# Altium PCB HM11.PcbDoc
Units mm, origin at the board's own origin, x right, y up, seen from the top; angles counter-clockwise.
Board outline 36.45 x 30.48 mm, 2 copper layers (Top Layer, Bottom Layer); 22 components, 29 nets, 107 pads, 20 vias.
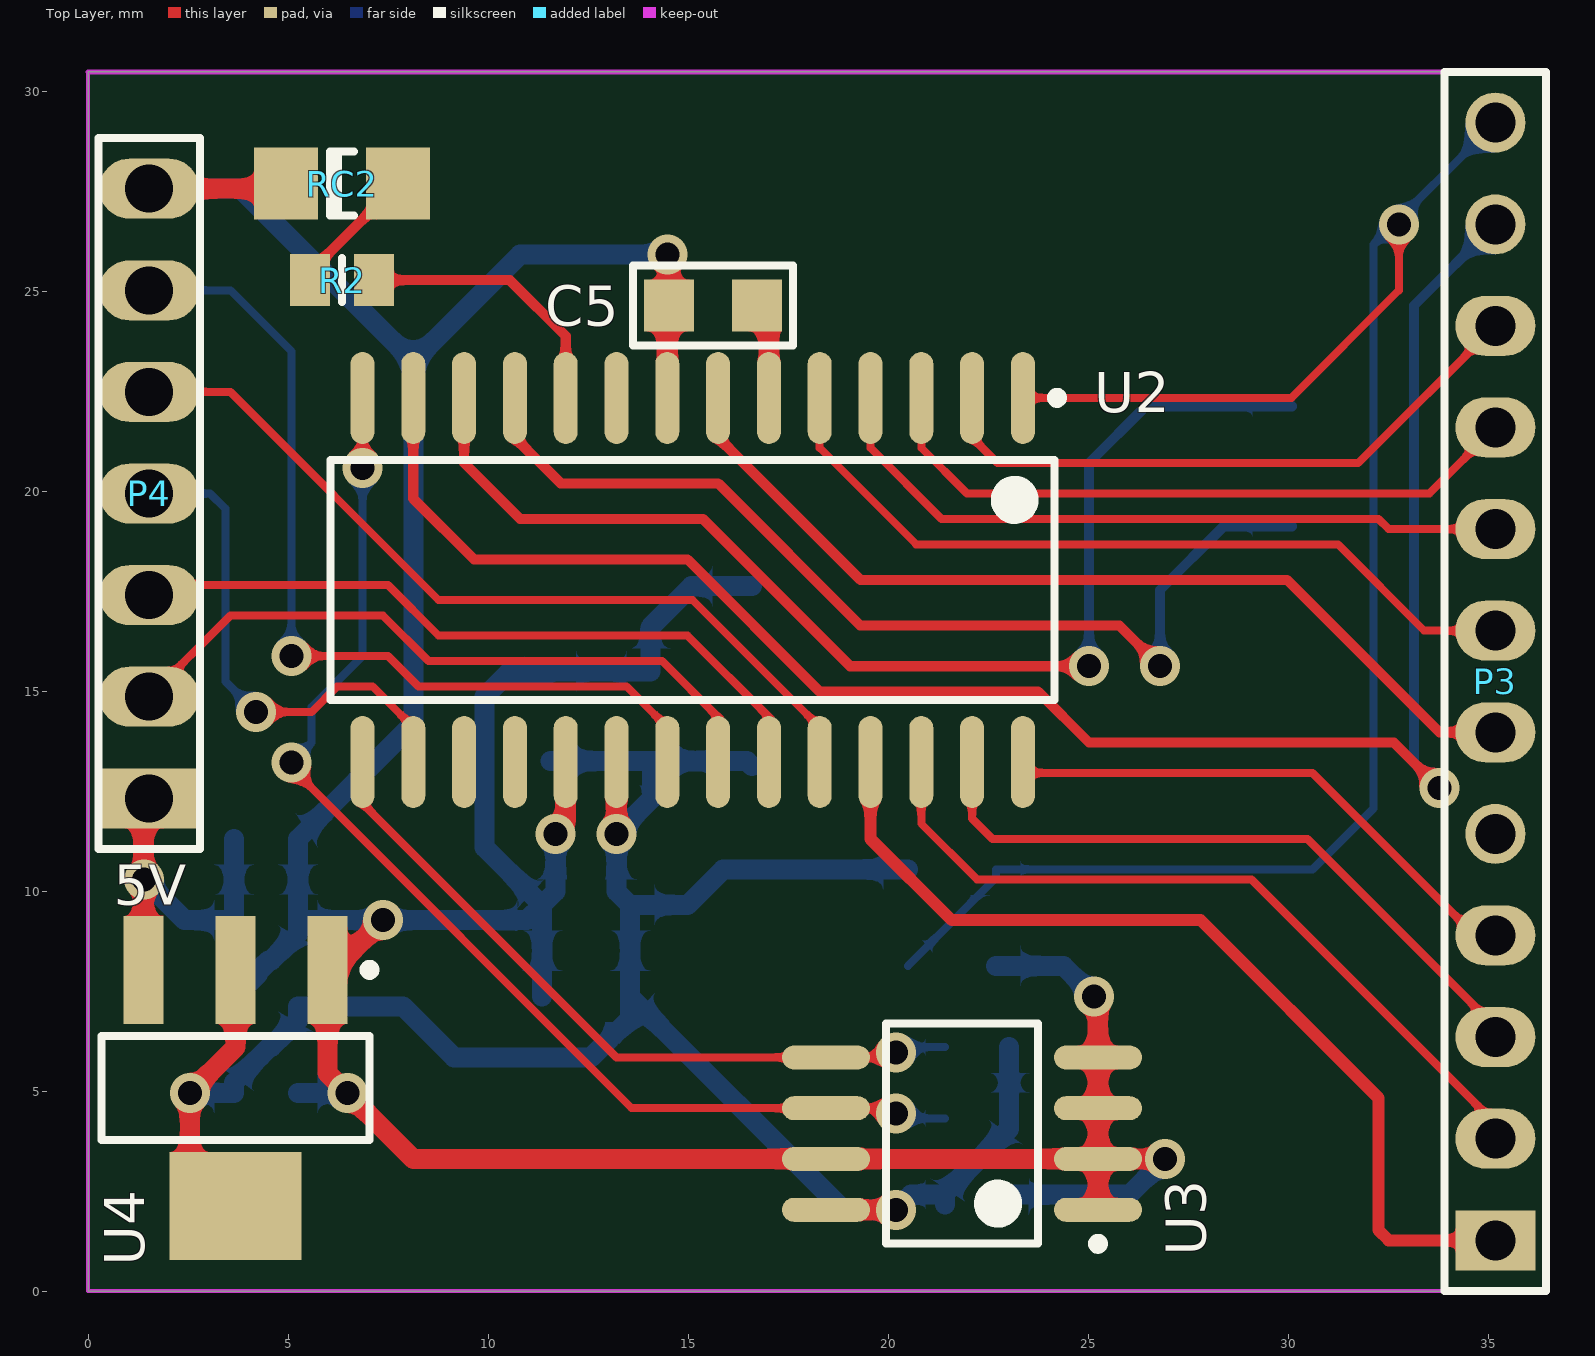
[diagram p0: Top Layer view]
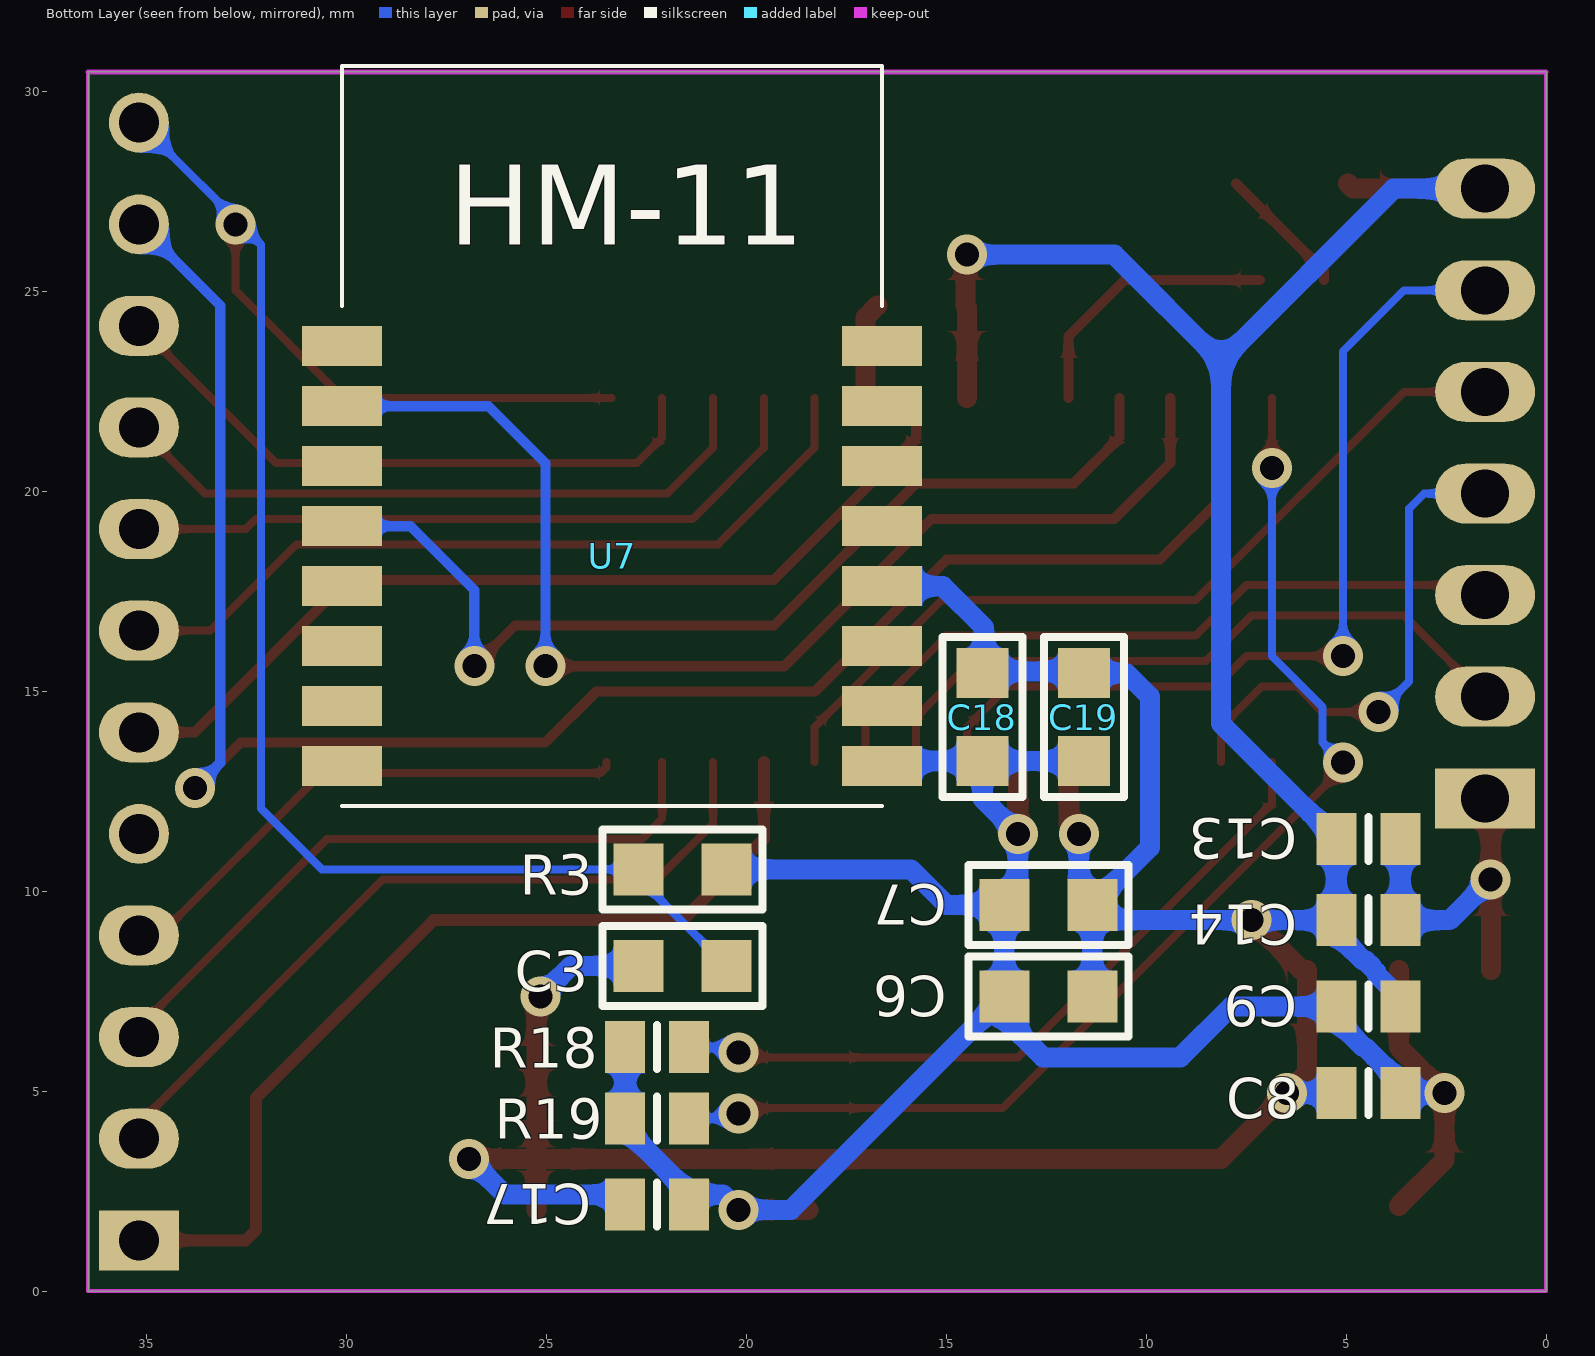
[diagram p1: Bottom Layer view, seen from below]

## Layer stack, top to bottom
Top Solder: solder mask 0.0102, Solder Resist, Dk 3.5
Top Layer: signal copper 0.0356
Dielectric1: dielectric 0.32, FR-4, Dk 4.8
Bottom Layer: signal copper 0.0356
Bottom Solder: solder mask 0.0102, Solder Resist, Dk 3.5

## Board outline
0,0 0,30.48 36.449,30.48 36.449,0

## Design rules (kind name [scope] priority, off if disabled: settings)
Clearance [All] p1: gap=0.254
MinimumSolderMaskSliver [All] p1 off: minsoldermaskwidth=0.254
PlaneConnect [All] p1: planeconnectstyle=Direct reliefexpansion=0.508 reliefentries=4 reliefconductorwidth=0.254 reliefairgap=0.254
PolygonConnect [All] p1: connectstyle=Relief reliefconductorwidth=0.254 reliefentries=4 polygonreliefangle="90 Angle" airgapwidth=0.254
RoutingVias [All] p1: holewidth=0.711 width=1.27 viastyle="Through Hole" minholewidth=0.2 minwidth=0.3 maxholewidth=2 maxwidth=3
SilkToSilkClearance [All] p1 off: silktosilkclearance=0.254
SilkToSolderMaskClearance SilkscreenOverComponentPads [IsPad] p1 off: minsilkscreentomaskgap=0.254 clearancetoexposedcopper=TRUE
SolderMaskExpansion [All] p1: expansion=0.102
Width [All] p1: maxlimit=1 minlimit=0.2 preferedwidth=0.254
26 further rules are at their usual default settings.

## Components (designator, comment, footprint, x,y, rotation, side; value= is the part's Value field where it differs from the comment)
C3 "CL21F104ZBCNNNC" CAPC2013X05N 21.59,8.128 r180 bottom
C5 "GRM219R60J106KE19D" CAPC2013X05N 15.621,24.638 r0 top
C6 "GRM219R60J106KE19D" CAPC2013X05N 12.446,7.366 r0 bottom
C7 "GRM219R60J106KE19D" CAPC2013X05N 12.446,9.652 r0 bottom
C8 "CL21F104ZBCNNNC" RESC2012L 4.445,4.953 r0 bottom
C9 "GRM219R60J106KE19D" RESC2012L 4.445,7.112 r180 bottom
C13 "CL21F104ZBCNNNC" RESC2012L 4.445,11.303 r0 bottom
C14 "GRM219R60J106KE19D" RESC2012L 4.445,9.271 r0 bottom
C17 "GRM219R60J106KE19D" RESC2012L 22.225,2.159 r0 bottom
C18 "CL21F104ZBCNNNC" CAPC2013X05N 14.097,14.351 r90 bottom
C19 "GRM219R60J106KE19D" CAPC2013X05N 11.557,14.351 r90 bottom
P3 "Header 12" HDR1X12 35.179,1.27 r90 top
P4 "Header 7" HDR1X7 1.524,12.319 r90 top
R2 "NC" RESC2012L 6.35,25.273 r180 top
R3 "ERJ-6GEYJ103V" RESC2013X05N 21.59,10.541 r0 bottom
R18 "ERJ-6GEYJ103V" RESC2012L 22.225,6.096 r0 bottom
R19 "ERJ-6GEYJ103V" RESC2012L 22.225,4.318 r0 bottom
RC2 "NC" CD3216-1206 6.35,27.686 r180 top
U2 "PIC18F24J11-I/SO" SOIC-SO28_N 15.113,17.78 r270 top locked
U3 "24AA1025T-I/SM" SOIJ-SM8_N 21.844,3.937 r180 top
U4 "AMS1117" SOT223-4M 3.683,5.08 r270 top
U7 "HM-11" HM-11 30.099,23.622 r180 bottom

## Footprints (in the part's own frame and the unit in brackets; to place one, negate y for a bottom-side part, rotate by r counter-clockwise, add the part's x,y. Pads: shape width x height; smd on the part's side, far side on the other; paste and mask are expansions set on the pad)
CAPC2013X05N [mm] "Chip Capacitor, 2-Leads, Body 2,0x1,3mm, IPC Medium Density"
  rect 1.25x1.3 smd: 1(-1.1,0) 2(1.1,0)
  silkscreen extent -2,-1 2,1, body extent -1.05,-0.67 1.05,0.68, height 0.5
CD3216-1206 [mm] "Chip Diode; Body 3.2 x 1.6 mm (LxW typ)"
  rect 1.6x1.8 smd: 1(-1.4,0) 2(1.4,0)
  silkscreen extent -0.3,-0.8 0.3,0.8
HDR1X7 [mm] "Connector; Header; 7 Position"
  rect 1.5x2.5 hole 1.2: 1(0,0)
  oval 1.5x2.5 hole 1.2: 2(2.54,0) 3(5.08,0) 4(7.62,0) 5(10.16,0) 6(12.7,0) 7(15.24,0)
  silkscreen extent -1.27,-1.27 16.51,1.27
HDR1X12 [mm] "Connector; Header; 12 Position"
  rect 1.5x2 hole 1: 1(0,0)
  oval 1.5x2 hole 1: 2(2.54,0) 3(5.08,0) 4(7.62,0) 6(12.7,0) 7(15.24,0) 8(17.78,0) 9(20.32,0) 10(22.86,0)
  round 1.5 hole 1: 5(10.16,0) 11(25.4,0) 12(27.94,0)
  silkscreen extent -1.27,-1.27 29.21,1.27
HM-11 [mm]
  rect 2x1 smd mask+0.001: 1(0,0) 2(0,-1.5) 3(0,-3) 4(0,-4.5) 5(0,-6) 6(0,-7.5) 7(0,-9) 8(0,-10.5) 9(13.5,-10.5) 10(13.5,-9) 11(13.5,-7.5) 12(13.5,-6) 13(13.5,-4.5) 14(13.5,-3) 15(13.5,-1.5) 16(13.5,0)
  silkscreen extent 0,-11.5 13.5,7
RESC2012L [mm] "Chip Resistor, Body 2.0x1.3mm, IPC High Density"
  rect 1x1.3 smd: 1(-0.8,0) 2(0.8,0)
  silkscreen extent 0,-0.55 0,0.55, body extent -1.07,-0.7 1.07,0.7, height 0.65
RESC2013X05N [mm] "Chip Resistor, 2-Leads, Body 2,0x1,3mm, IPC Medium Density"
  rect 1.25x1.3 smd: 1(1.1,0) 2(-1.1,0)
  silkscreen extent -2,-1 2,1, body extent -1.05,-0.68 1.05,0.67, height 0.5
SOIC-SO28_N [mm] "SOIC, 28-Leads, Body 17.9x7.5mm, Pitch 1.27mm, IPC Medium Density"
  oval 2.3x0.6 smd: 1(-4.55,8.255) 2(-4.55,6.985) 3(-4.55,5.715) 4(-4.55,4.445) 5(-4.55,3.175) 6(-4.55,1.905) 7(-4.55,0.635) 8(-4.55,-0.635) 9(-4.55,-1.905) 10(-4.55,-3.175) 11(-4.55,-4.445) 12(-4.55,-5.715) 13(-4.55,-6.985) 14(-4.55,-8.255) 15(4.55,-8.255) 16(4.55,-6.985) 17(4.55,-5.715) 18(4.55,-4.445) 19(4.55,-3.175) 20(4.55,-1.905) 21(4.55,-0.635) 22(4.55,0.635) 23(4.55,1.905) 24(4.55,3.175) 25(4.55,4.445) 26(4.55,5.715) 27(4.55,6.985) 28(4.55,8.255)
  silkscreen extent -4.67,-9.05 3,9.23, body extent -3.8,-9.06 3.8,9.06, height 2.65
SOIJ-SM8_N [mm] "SOP, 8-Leads, Body 5.2x5.2mm, Pitch 1.27mm, IPC Medium Density"
  oval 2.2x0.6 smd: 1(-3.4,1.905) 2(-3.4,0.635) 3(-3.4,-0.635) 4(-3.4,-1.905) 5(3.4,-1.905) 6(3.4,-0.635) 7(3.4,0.635) 8(3.4,1.905)
  silkscreen extent -3.52,-2.75 1.9,2.88, body extent -2.73,-2.75 2.73,2.75, height 2.04
SOT223-4M [mm] "SOT223, 4-Leads, Body 6.5x3.5mm, Pitch 2.3mm, Lead Span 7mm, IPC Low Density"
  rect 2.7x1 smd: 1(-2.95,2.3) 2(-2.95,0) 3(-2.95,-2.3)
  rect 2.7x3.3 smd: 4(2.95,0)
  silkscreen extent -3.07,-3.35 1.3,3.48, body extent -1.85,-3.35 1.85,3.35, height 1.8

## Part data
C3: library part "Cap Semi", "0.10µF 50V Ceramic Capacitor Y5V (F) 0805 (2012 Metric) 0.079\" L x 0.049\" W (2.00mm x 1.25mm)"
C5 C6: library part "Cap Semi", "10µF 6.3V Ceramic Capacitor X5R 0805 (2012 Metric) 0.079\" L x 0.049\" W (2.00mm x 1.25mm)"
C7: library part "Cap Semi", "0.10µF 50V Cera2012 Metric) 0.079\" L x 0.049\" W (2.00mm x 1.25mm)"
C8 C13 C18: library part Cap, "0.10µF 50V Ceramic Capacitor Y5V (F) 0805 (2012 Metric) 0.079\" L x 0.049\" W (2.00mm x 1.25mm)"
C9 C14 C17 C19: library part Cap, "10µF 6.3V Ceramic Capacitor X5R 0805 (2012 Metric) 0.079\" L x 0.049\" W (2.00mm x 1.25mm)"
P3: "Header, 12-Pin"
P4: "Header, 7-Pin"
R2: library part Res3
R3 R18 R19: library part Res3, "RES SMD 10K OHM 5% 1/8W 0805"
RC2: library part LEDRED1206, "LED BLUE THRU BOARD 1206"
U2: "Low Power, High Performance Microcontroller with nanoWatt XLP Technology, 28-pin SOIC, Industrial Temperature"
U3: "1 Mbit, 400kHz, 1.7V, I2C Serial EEPROM, 8-Pin SOIC 208mil, Industrial Temperature, Tape and Reel"
U4: "Adjustable Precision Shunt Regulator"

## Via types
v1: diameter 1, hole 0.6, Top Layer to Bottom Layer, 20 vias

## Nets (pads, with @x,y where several pads share a name; then routed paths per layer and width w, separated by ;. In a path a pad name is that pad's centre, name@x,y a point inside that pad or via, vN(x,y) a via of type N, cw(c..) or ccw(c..) an arc to the next point about the centre after c; other vN are vias at no path point)
C0: P3.6 U2.7 | length 23.5
  Top Layer w0.2: P3.6@34.925,13.97 P3.6
  Top Layer w0.254: U2.7 15.748,21.336 19.304,17.78 29.972,17.78 33.782,13.97 P3.6@34.925,13.97
C1: P3.7 U2.5 | length 20.4
  Top Layer w0.2: U2.5 18.288,21.082 20.701,18.669 31.242,18.669 33.401,16.51 P3.7
  Bottom Layer w0.254: P3.7 P3.7@35.179,16.891
C2: P3.8 U2.4 | length 17.7
  Top Layer w0.2: U2.4 19.558,21.082 21.336,19.304 32.258,19.304 32.512,19.05 P3.8
C3: P3.9 U2.3 | length 16.8
  Top Layer w0.2: U2.3 20.828,21.082 21.971,19.939 33.528,19.939 P3.9
C4: P3.10 U2.2 | length 16
  Top Layer w0.2: U2.2 22.098,21.336 22.733,20.701 31.75,20.701 P3.10
  Bottom Layer w0.5: P3.10 P3.10@35.179,24.384
C5: P3.11 U2.13 | length 46.4
  Top Layer w0.254: U2.13 8.128,19.812 9.652,18.288 14.986,18.288 18.288,14.986 23.749,14.986 25.019,13.716 32.639,13.716 v1(33.782,12.573)
  Bottom Layer w0.254: v1(33.782,12.573) 33.147,13.208 33.147,24.638 P3.11
CLK1: P4.3 U2.23 | length 18.1
  Top Layer w0.2: P4.3 1.778,17.653 7.493,17.653 8.763,16.383 14.986,16.383 17.018,14.351 U2.23
CLK2: P4.5 U2.24 | length 21.1
  Top Layer w0.2: P4.5 3.556,22.479 8.763,17.272 15.113,17.272 18.288,14.097 U2.24
DAT1: P4.2 U2.22 | length 17.2
  Top Layer w0.2: P4.2 3.556,16.891 7.366,16.891 8.509,15.748 14.351,15.748 15.748,14.351 U2.22
DAT2: P4.4 U2.16 | length 12.9
  Top Layer w0.2: v1(4.191,14.478) 5.588,14.478 6.223,15.113 7.112,15.113 8.128,14.097 U2.16
  Bottom Layer w0.2: P4.4 3.048,19.939 3.429,19.558 3.429,15.24 v1(4.191,14.478)
GND: C3.1 C5.1 C6.1 C7.1 C8.2 C9.2 C13.2 C14.2 C17.2 C18.2 C19.2 P4.7 RC2.2 U2.8 U2.19 U3.1 U3.2 U3.3 U3.4 U3.7 U4.1 U7.12 | length 107.8
  Top Layer w0.5: P4.7 4.823,27.559 RC2.2 ; v1(7.366,9.271) 6.125,8.03 U4.1 5.983,5.447 v1(6.477,4.953) 8.128,3.302 U3.7 U3.2 ; v1(11.684,11.43) 11.938,11.684 U2.19 ; U2.8 14.478,24.595 C5.1 14.521,25.865 v1(14.478,25.908) ; v1(25.146,7.366) 25.244,7.268 U3.4 U3.3 U3.2 ; U3.1 U3.2 ; v1(26.924,3.302) U3.2
  Bottom Layer w0.5: P4.7 3.81,27.559 8.128,23.241 ; C9.2 3.645,7.328 4.241,7.924 4.241,7.971 4.536,8.266 4.583,8.266 5.245,8.928 C14.2 ; 4.354,8.117 4.503,8.266 ; C8.2 v1(6.477,4.953) ; C6.1 C7.1 ; C19.2 10.498,15.451 9.906,14.859 9.906,11.092 C7.1 ; C19.2@11.557,15.494 14.054,15.494 14.054,16.594 15.082,17.622 U7.12 ; v1(11.684,11.43) 11.684,9.99 C7.1 ; v1(14.478,25.908) 10.795,25.908 8.128,23.241 ; C3.1 24.384,8.128 v1(25.146,7.366) ; C17.2@23.025,2.413 26.035,2.413 v1(26.924,3.302) ; C14.2 v1(7.366,9.271) 10.965,9.271 C7.1 ; C14.2 C13.2 8.128,14.186 8.128,23.241
LED: R2.1 U2.10 | length 6.9
  Top Layer w0.254: R2.1 10.541,25.273 11.938,23.876 U2.10
MCU_RXD0: U2.18
MCU_TXD0: U2.17
NetC5_2: C5.2 U2.6 | length 2.4
  Top Layer w0.5: C5.2 17.018,24.341 U2.6
NetR2_2: R2.2 RC2.1 | length 3.3
  Top Layer w0.254: R2.2 5.55,25.486 RC2.1
PGC: P3.3 U2.27 | length 16.9
  Top Layer w0.2: U2.27 22.098,11.811 22.606,11.303 30.48,11.303 35.179,6.604 P3.3
PGD: P3.4 U2.28 | length 13.6
  Top Layer w0.2: U2.28@23.495,13.23 23.495,13.103 23.644,12.954 30.607,12.954 34.671,8.89 P3.4
PRE: P4.6 U2.21 | length 22.8
  Top Layer w0.2: v1(5.08,15.875) 7.493,15.875 8.255,15.113 13.462,15.113 14.478,14.097 U2.21
  Bottom Layer w0.2: P4.6 3.556,25.019 5.08,23.495 v1(5.08,15.875)
R0: P3.1 U2.25 | length 24.4
  Top Layer w0.3: U2.25 19.558,11.303 21.59,9.271 27.813,9.271 32.258,4.826 32.258,1.524 32.512,1.27 P3.1
  Bottom Layer w0.3: P3.1@34.671,1.778 P3.1
R1: P3.2 U2.26 | length 19.4
  Top Layer w0.2: U2.26 20.828,11.684 22.225,10.287 29.083,10.287 35.179,4.191 P3.2
RLKA: U2.9
RST: C3.2 P3.12 R3.1 U2.1 | length 44
  Top Layer w0.2: U2.1 30.077,22.33 32.766,25.019 v1(32.766,26.67)
  Bottom Layer w0.2: C3.2 22.69,10.328 R3.1 30.607,10.541 32.131,12.065 32.131,26.162 P3.12
RX: U2.12 U7.2 | length 30.1
  Top Layer w0.254: U2.12 9.398,20.701 10.795,19.304 15.367,19.304 19.05,15.621 v1(25.019,15.621)
  Bottom Layer w0.254: v1(25.019,15.621) 25.019,20.701 26.44,22.122 U7.2
SCL: R19.1 U2.14 U3.6 | length 30
  Top Layer w0.2: v1(5.08,13.208) 5.08,13.081 13.589,4.572 U3.6 20.066,4.572 v1(20.193,4.445) ; v1(6.858,20.574) U2.14
  Bottom Layer w0.2: v1(5.08,13.208) 5.588,13.716 5.588,14.605 6.858,15.875 v1(6.858,20.574) ; v1(20.193,4.445) 20.32,4.318 R19.1
SDA: R18.1 U2.15 U3.5 | length 18.3
  Top Layer w0.2: U2.15 6.858,12.192 13.208,5.842 U3.5 20.066,5.842 v1(20.193,5.969)
  Bottom Layer w0.2: v1(20.193,5.969) 20.32,6.096 R18.1
TX: U2.11 U7.4 | length 25.4
  Top Layer w0.254: U2.11 10.668,21.336 11.811,20.193 15.748,20.193 19.303,16.638 25.78,16.638 v1(26.797,15.621)
  Bottom Layer w0.254: v1(26.797,15.621) 26.797,17.526 28.393,19.122 U7.4
VCC: C13.1 C14.1 P4.1 U4.3 | length 9
  Top Layer w0.5: U4.3 1.383,12.178 P4.1
  Bottom Layer w0.5: v1(1.397,10.287) 2.413,9.271 C14.1 C13.1
VCC_MCU: C6.2 C7.2 C8.1 C9.1 C17.1 C18.1 C19.1 R3.2 R18.2 R19.2 U2.20 U3.8 U4.2 U4.4 U7.9 | length 57.8
  Top Layer w0.5: U4.4 2.54,3.273 v1(2.54,4.953) 3.683,6.096 U4.2 ; v1(13.208,11.43) U2.20 ; U3.8 v1(20.193,2.032)
  Bottom Layer w0.5: v1(2.54,4.953) C8.1 3.645,5.216 4.536,6.107 4.583,6.107 5.245,6.769 C9.1 7.874,7.112 9.144,5.842 12.573,5.842 13.546,6.815 C6.2 ; C19.1 C18.1 ; U7.9 16.47,13.251 C18.1 ; R3.2 15.875,10.541 14.986,9.652 C7.2 ; C17.1 C17.1@21.425,2.413 ; R18.2 R19.2 23.025,4.055 21.425,2.455 C17.1@21.425,2.413 ; C6.2 18.88,2.032 v1(20.193,2.032) 20.574,2.413 C17.1@21.425,2.413 ; C6.2 C7.2 ; C7.2 13.208,9.99 v1(13.208,11.43) 14.097,12.319 C18.1
pads on no net: P3.5 U7.1 U7.3 U7.5 U7.6 U7.7 U7.8 U7.10 U7.11 U7.13 U7.14 U7.15 U7.16

## Keep-outs
Keep-Out Layer:
  the board outline again, w0.1

## Silkscreen, mask and mechanical layers (free items; w line width, h text height)
Top Overlay:
  text "5V" at 0.635,9.652 h1
Bottom Overlay:
  text "HM-11" at 27.432,26.162 h2
Mechanical 13:
  lines w0.1: -3.429,25.781 36.571,25.781